# EAGLE board FLATPACKS (EAGLE 4.09)

Size 160 x 100 mm. Coordinates in mm from the lower left corner, seen from the top.
Outline: 0,0 160,0 160,100 0,100 0,0
Copper layers used: 

## Footprints (pad centres in the part's own frame; a part is rotated, then mirrored left to right if it is on the bottom)
TQFP32 = smd 1.27 x 0.559: 1 -4.293,2.743; 2 -4.293,1.956; 3 -4.293,1.168; 4 -4.293,0.381; 5 -4.293,-0.381; 6 -4.293,-1.168; 7 -4.293,-1.956; 8 -4.293,-2.743; 17 4.293,-2.743; 18 4.293,-1.956; 19 4.293,-1.168; 20 4.293,-0.381; 21 4.293,0.381; 22 4.293,1.168; 23 4.293,1.956; 24 4.293,2.743 | smd 0.559 x 1.27: 9 -2.743,-4.293; 10 -1.956,-4.293; 11 -1.168,-4.293; 12 -0.381,-4.293; 13 0.381,-4.293; 14 1.168,-4.293; 15 1.956,-4.293; 16 2.743,-4.293; 25 2.743,4.293; 26 1.956,4.293; 27 1.168,4.293; 28 0.381,4.293; 29 -0.381,4.293; 30 -1.168,4.293; 31 -1.956,4.293; 32 -2.743,4.293
TQFP44 = smd 1.5 x 0.5: 1 -5.8,4; 2 -5.8,3.2; 3 -5.8,2.4; 4 -5.8,1.6; 5 -5.8,0.8; 6 -5.8,0; 7 -5.8,-0.8; 8 -5.8,-1.6; 9 -5.8,-2.4; 10 -5.8,-3.2; 11 -5.8,-4; 23 5.8,-4; 24 5.8,-3.2; 25 5.8,-2.4; 26 5.8,-1.6; 27 5.8,-0.8; 28 5.8,0; 29 5.8,0.8; 30 5.8,1.6; 31 5.8,2.4; 32 5.8,3.2; 33 5.8,4 | smd 0.5 x 1.5: 12 -4,-5.8; 13 -3.2,-5.8; 14 -2.4,-5.8; 15 -1.6,-5.8; 16 -0.8,-5.8; 17 0,-5.8; 18 0.8,-5.8; 19 1.6,-5.8; 20 2.4,-5.8; 21 3.2,-5.8; 22 4,-5.8; 34 4,5.8; 35 3.2,5.8; 36 2.4,5.8; 37 1.6,5.8; 38 0.8,5.8; 39 0,5.8; 40 -0.8,5.8; 41 -1.6,5.8; 42 -2.4,5.8; 43 -3.2,5.8; 44 -4,5.8
TQFP64 = smd 1.194 x 0.559: 1 -7.76,5.905; 2 -7.76,5.118; 3 -7.76,4.331; 4 -7.76,3.543; 5 -7.76,2.756; 6 -7.76,1.968; 7 -7.76,1.181; 8 -7.76,0.394; 9 -7.76,-0.394; 10 -7.76,-1.181; 11 -7.76,-1.968; 12 -7.76,-2.756; 13 -7.76,-3.543; 14 -7.76,-4.331; 15 -7.76,-5.118; 16 -7.76,-5.905; 33 7.76,-5.905; 34 7.76,-5.118; 35 7.76,-4.331; 36 7.76,-3.543; 37 7.76,-2.756; 38 7.76,-1.968; 39 7.76,-1.181; 40 7.76,-0.394; 41 7.76,0.394; 42 7.76,1.181; 43 7.76,1.968; 44 7.76,2.756; 45 7.76,3.543; 46 7.76,4.331; 47 7.76,5.118; 48 7.76,5.905 | smd 0.559 x 1.194: 17 -5.905,-7.76; 18 -5.118,-7.76; 19 -4.331,-7.76; 20 -3.543,-7.76; 21 -2.756,-7.76; 22 -1.968,-7.76; 23 -1.181,-7.76; 24 -0.394,-7.76; 25 0.394,-7.76; 26 1.181,-7.76; 27 1.968,-7.76; 28 2.756,-7.76; 29 3.543,-7.76; 30 4.331,-7.76; 31 5.118,-7.76; 32 5.905,-7.76; 49 5.905,7.76; 50 5.118,7.76; 51 4.331,7.76; 52 3.543,7.76; 53 2.756,7.76; 54 1.968,7.76; 55 1.181,7.76; 56 0.394,7.76; 57 -0.394,7.76; 58 -1.181,7.76; 59 -1.968,7.76; 60 -2.756,7.76; 61 -3.543,7.76; 62 -4.331,7.76; 63 -5.118,7.76; 64 -5.905,7.76
TQFP144 = smd 0.27 x 1.5: 1 -8.75,-10.75; 2 -8.25,-10.75; 3 -7.75,-10.75; 4 -7.25,-10.75; 5 -6.75,-10.75; 6 -6.25,-10.75; 7 -5.75,-10.75; 8 -5.25,-10.75; 9 -4.75,-10.75; 10 -4.25,-10.75; 11 -3.75,-10.75; 12 -3.25,-10.75; 13 -2.75,-10.75; 14 -2.25,-10.75; 15 -1.75,-10.75; 16 -1.25,-10.75; 17 -0.75,-10.75; 18 -0.25,-10.75; 19 0.25,-10.75; 20 0.75,-10.75; 21 1.25,-10.75; 22 1.75,-10.75; 23 2.25,-10.75; 24 2.75,-10.75; 25 3.25,-10.75; 26 3.75,-10.75; 27 4.25,-10.75; 28 4.75,-10.75; 29 5.25,-10.75; 30 5.75,-10.75; 31 6.25,-10.75; 32 6.75,-10.75; 33 7.25,-10.75; 34 7.75,-10.75; 35 8.25,-10.75; 36 8.75,-10.75; 73 8.75,10.75; 74 8.25,10.75; 75 7.75,10.75; 76 7.25,10.75; 77 6.75,10.75; 78 6.25,10.75; 79 5.75,10.75; 80 5.25,10.75; 81 4.75,10.75; 82 4.25,10.75; 83 3.75,10.75; 84 3.25,10.75; 85 2.75,10.75; 86 2.25,10.75; 87 1.75,10.75; 88 1.25,10.75; 89 0.75,10.75; 90 0.25,10.75; 91 -0.25,10.75; 92 -0.75,10.75; 93 -1.25,10.75; 94 -1.75,10.75; 95 -2.25,10.75; 96 -2.75,10.75; 97 -3.25,10.75; 98 -3.75,10.75; 99 -4.25,10.75; 100 -4.75,10.75; 101 -5.25,10.75; 102 -5.75,10.75; 103 -6.25,10.75; 104 -6.75,10.75; 105 -7.25,10.75; 106 -7.75,10.75; 107 -8.25,10.75; 108 -8.75,10.75 | smd 1.5 x 0.27: 37 10.75,-8.75; 38 10.75,-8.25; 39 10.75,-7.75; 40 10.75,-7.25; 41 10.75,-6.75; 42 10.75,-6.25; 43 10.75,-5.75; 44 10.75,-5.25; 45 10.75,-4.75; 46 10.75,-4.25; 47 10.75,-3.75; 48 10.75,-3.25; 49 10.75,-2.75; 50 10.75,-2.25; 51 10.75,-1.75; 52 10.75,-1.25; 53 10.75,-0.75; 54 10.75,-0.25; 55 10.75,0.25; 56 10.75,0.75; 57 10.75,1.25; 58 10.75,1.75; 59 10.75,2.25; 60 10.75,2.75; 61 10.75,3.25; 62 10.75,3.75; 63 10.75,4.25; 64 10.75,4.75; 65 10.75,5.25; 66 10.75,5.75; 67 10.75,6.25; 68 10.75,6.75; 69 10.75,7.25; 70 10.75,7.75; 71 10.75,8.25; 72 10.75,8.75; 109 -10.75,8.75; 110 -10.75,8.25; 111 -10.75,7.75; 112 -10.75,7.25; 113 -10.75,6.75; 114 -10.75,6.25; 115 -10.75,5.75; 116 -10.75,5.25; 117 -10.75,4.75; 118 -10.75,4.25; 119 -10.75,3.75; 120 -10.75,3.25; 121 -10.75,2.75; 122 -10.75,2.25; 123 -10.75,1.75; 124 -10.75,1.25; 125 -10.75,0.75; 126 -10.75,0.25; 127 -10.75,-0.25; 128 -10.75,-0.75; 129 -10.75,-1.25; 130 -10.75,-1.75; 131 -10.75,-2.25; 132 -10.75,-2.75; 133 -10.75,-3.25; 134 -10.75,-3.75; 135 -10.75,-4.25; 136 -10.75,-4.75; 137 -10.75,-5.25; 138 -10.75,-5.75; 139 -10.75,-6.25; 140 -10.75,-6.75; 141 -10.75,-7.25; 142 -10.75,-7.75; 143 -10.75,-8.25; 144 -10.75,-8.75
TQFP100 = smd 1.5 x 0.35: 1 -8,6; 2 -8,5.5; 3 -8,5; 4 -8,4.5; 5 -8,4; 6 -8,3.5; 7 -8,3; 8 -8,2.5; 9 -8,2; 10 -8,1.5; 11 -8,1; 12 -8,0.5; 13 -8,0; 14 -8,-0.5; 15 -8,-1; 16 -8,-1.5; 17 -8,-2; 18 -8,-2.5; 19 -8,-3; 20 -8,-3.5; 21 -8,-4; 22 -8,-4.5; 23 -8,-5; 24 -8,-5.5; 25 -8,-6; 51 8,-6; 52 8,-5.5; 53 8,-5; 54 8,-4.5; 55 8,-4; 56 8,-3.5; 57 8,-3; 58 8,-2.5; 59 8,-2; 60 8,-1.5; 61 8,-1; 62 8,-0.5; 63 8,0; 64 8,0.5; 65 8,1; 66 8,1.5; 67 8,2; 68 8,2.5; 69 8,3; 70 8,3.5; 71 8,4; 72 8,4.5; 73 8,5; 74 8,5.5; 75 8,6 | smd 0.35 x 1.5: 26 -6,-8; 27 -5.5,-8; 28 -5,-8; 29 -4.5,-8; 30 -4,-8; 31 -3.5,-8; 32 -3,-8; 33 -2.5,-8; 34 -2,-8; 35 -1.5,-8; 36 -1,-8; 37 -0.5,-8; 38 0,-8; 39 0.5,-8; 40 1,-8; 41 1.5,-8; 42 2,-8; 43 2.5,-8; 44 3,-8; 45 3.5,-8; 46 4,-8; 47 4.5,-8; 48 5,-8; 49 5.5,-8; 50 6,-8; 76 6,8; 77 5.5,8; 78 5,8; 79 4.5,8; 80 4,8; 81 3.5,8; 82 3,8; 83 2.5,8; 84 2,8; 85 1.5,8; 86 1,8; 87 0.5,8; 88 0,8; 89 -0.5,8; 90 -1,8; 91 -1.5,8; 92 -2,8; 93 -2.5,8; 94 -3,8; 95 -3.5,8; 96 -4,8; 97 -4.5,8; 98 -5,8; 99 -5.5,8; 100 -6,8
QFP-44 = smd 0.4 x 2.2: 1 -4,-6.25; 2 -3.2,-6.25; 3 -2.4,-6.25; 4 -1.6,-6.25; 5 -0.8,-6.25; 6 0,-6.25; 7 0.8,-6.25; 8 1.6,-6.25; 9 2.4,-6.24; 10 3.2,-6.25; 11 4,-6.25; 23 4,6.25; 24 3.2,6.25; 25 2.4,6.26; 26 1.6,6.25; 27 0.8,6.25; 28 0,6.25; 29 -0.8,6.25; 30 -1.6,6.25; 31 -2.4,6.25; 32 -3.2,6.25; 33 -4,6.25 | smd 2.2 x 0.4: 12 6.75,-4; 13 6.75,-3.2; 14 6.75,-2.4; 15 6.75,-1.6; 16 6.75,-0.8; 17 6.75,0; 18 6.75,0.8; 19 6.75,1.6; 20 6.74,2.4; 21 6.75,3.2; 22 6.75,4; 34 -6.75,4; 35 -6.75,3.2; 36 -6.76,2.4; 37 -6.75,1.6; 38 -6.75,0.8; 39 -6.75,0; 40 -6.75,-0.8; 41 -6.75,-1.6; 42 -6.75,-2.4; 43 -6.75,-3.2; 44 -6.75,-4
PQFP44 = smd 2 x 0.5: 1 -6.2,4; 2 -6.2,3.2; 3 -6.2,2.4; 4 -6.2,1.6; 5 -6.2,0.8; 6 -6.2,0; 7 -6.2,-0.8; 8 -6.2,-1.6; 9 -6.2,-2.4; 10 -6.2,-3.2; 11 -6.2,-4; 23 6.2,-4; 24 6.2,-3.2; 25 6.2,-2.4; 26 6.2,-1.6; 27 6.2,-0.8; 28 6.2,0; 29 6.2,0.8; 30 6.2,1.6; 31 6.2,2.4; 32 6.2,3.2; 33 6.2,4 | smd 0.5 x 2: 12 -4,-6.2; 13 -3.2,-6.2; 14 -2.4,-6.2; 15 -1.6,-6.2; 16 -0.8,-6.2; 17 0,-6.2; 18 0.8,-6.2; 19 1.6,-6.2; 20 2.4,-6.2; 21 3.2,-6.2; 22 4,-6.2; 34 4,6.2; 35 3.2,6.2; 36 2.4,6.2; 37 1.6,6.2; 38 0.8,6.2; 39 0,6.2; 40 -0.8,6.2; 41 -1.6,6.2; 42 -2.4,6.2; 43 -3.2,6.2; 44 -4,6.2
PQFP100 = smd 0.35 x 1.8: 1 -7.62,-10.7; 2 -6.985,-10.7; 3 -6.35,-10.7; 4 -5.715,-10.7; 5 -5.08,-10.7; 6 -4.445,-10.7; 7 -3.81,-10.7; 8 -3.175,-10.7; 9 -2.54,-10.7; 10 -1.905,-10.7; 11 -1.27,-10.7; 12 -0.635,-10.7; 13 0,-10.7; 14 0.635,-10.7; 15 1.27,-10.7; 16 1.905,-10.7; 17 2.54,-10.7; 18 3.175,-10.7; 19 3.81,-10.7; 20 4.445,-10.7; 21 5.08,-10.7; 22 5.715,-10.7; 23 6.35,-10.7; 24 6.985,-10.7; 25 7.62,-10.7; 51 7.62,10.7; 52 6.985,10.7; 53 6.35,10.7; 54 5.715,10.7; 55 5.08,10.7; 56 4.445,10.7; 57 3.81,10.7; 58 3.175,10.7; 59 2.54,10.7; 60 1.905,10.7; 61 1.27,10.7; 62 0.635,10.7; 63 0,10.7; 64 -0.635,10.7; 65 -1.27,10.7; 66 -1.905,10.7; 67 -2.54,10.7; 68 -3.175,10.7; 69 -3.81,10.7; 70 -4.445,10.7; 71 -5.08,10.7; 72 -5.715,10.7; 73 -6.35,10.7; 74 -6.985,10.7; 75 -7.62,10.7 | smd 1.8 x 0.35: 26 10.7,-7.62; 27 10.7,-6.985; 28 10.7,-6.35; 29 10.7,-5.715; 30 10.7,-5.08; 31 10.7,-4.445; 32 10.7,-3.81; 33 10.7,-3.175; 34 10.7,-2.54; 35 10.7,-1.905; 36 10.7,-1.27; 37 10.7,-0.635; 38 10.7,0; 39 10.7,0.635; 40 10.7,1.27; 41 10.7,1.905; 42 10.7,2.54; 43 10.7,3.175; 44 10.7,3.81; 45 10.7,4.445; 46 10.7,5.08; 47 10.7,5.715; 48 10.7,6.35; 49 10.7,6.985; 50 10.7,7.62; 76 -10.7,7.62; 77 -10.7,6.985; 78 -10.7,6.35; 79 -10.7,5.715; 80 -10.7,5.08; 81 -10.7,4.445; 82 -10.7,3.81; 83 -10.7,3.175; 84 -10.7,2.54; 85 -10.7,1.905; 86 -10.7,1.27; 87 -10.7,0.635; 88 -10.7,0; 89 -10.7,-0.635; 90 -10.7,-1.27; 91 -10.7,-1.905; 92 -10.7,-2.54; 93 -10.7,-3.175; 94 -10.7,-3.81; 95 -10.7,-4.445; 96 -10.7,-5.08; 97 -10.7,-5.715; 98 -10.7,-6.35; 99 -10.7,-6.985; 100 -10.7,-7.62
SQFP-R-14X20-100 = smd 0.4 x 1.8: 1 -9.425,-8.1; 2 -8.775,-8.1; 3 -8.125,-8.1; 4 -7.475,-8.1; 5 -6.825,-8.1; 6 -6.175,-8.1; 7 -5.525,-8.1; 8 -4.875,-8.1; 9 -4.225,-8.1; 10 -3.575,-8.1; 11 -2.925,-8.1; 12 -2.275,-8.1; 13 -1.625,-8.1; 14 -0.975,-8.1; 15 -0.325,-8.1; 16 0.325,-8.1; 17 0.975,-8.1; 18 1.625,-8.1; 19 2.275,-8.1; 20 2.925,-8.1; 21 3.575,-8.1; 22 4.225,-8.1; 23 4.875,-8.1; 24 5.525,-8.1; 25 6.175,-8.1; 26 6.825,-8.1; 27 7.475,-8.1; 28 8.125,-8.1; 29 8.775,-8.1; 30 9.425,-8.1; 51 9.425,8.1; 52 8.775,8.1; 53 8.125,8.1; 54 7.475,8.1; 55 6.825,8.1; 56 6.175,8.1; 57 5.525,8.1; 58 4.875,8.1; 59 4.225,8.1; 60 3.575,8.1; 61 2.925,8.1; 62 2.275,8.1; 63 1.625,8.1; 64 0.975,8.1; 65 0.325,8.1; 66 -0.325,8.1; 67 -0.975,8.1; 68 -1.625,8.1; 69 -2.275,8.1; 70 -2.925,8.1; 71 -3.575,8.1; 72 -4.225,8.1; 73 -4.875,8.1; 74 -5.525,8.1; 75 -6.175,8.1; 76 -6.825,8.1; 77 -7.475,8.1; 78 -8.125,8.1; 79 -8.775,8.1; 80 -9.425,8.1 | smd 1.8 x 0.4: 31 11.1,-6.175; 32 11.1,-5.525; 33 11.1,-4.875; 34 11.1,-4.225; 35 11.1,-3.575; 36 11.1,-2.925; 37 11.1,-2.275; 38 11.1,-1.625; 39 11.1,-0.975; 40 11.1,-0.325; 41 11.1,0.325; 42 11.1,0.975; 43 11.1,1.625; 44 11.1,2.275; 45 11.1,2.925; 46 11.1,3.575; 47 11.1,4.225; 48 11.1,4.875; 49 11.1,5.525; 50 11.1,6.175; 81 -11.1,6.175; 82 -11.1,5.525; 83 -11.1,4.875; 84 -11.1,4.225; 85 -11.1,3.575; 86 -11.1,2.925; 87 -11.1,2.275; 88 -11.1,1.625; 89 -11.1,0.975; 90 -11.1,0.325; 91 -11.1,-0.325; 92 -11.1,-0.975; 93 -11.1,-1.625; 94 -11.1,-2.275; 95 -11.1,-2.925; 96 -11.1,-3.575; 97 -11.1,-4.225; 98 -11.1,-4.875; 99 -11.1,-5.525; 100 -11.1,-6.175
PQFP160 = smd 2 x 0.45: 1 -15.275,12.675; 2 -15.275,12.025; 3 -15.275,11.375; 4 -15.275,10.725; 5 -15.275,10.075; 6 -15.275,9.425; 7 -15.275,8.775; 8 -15.275,8.125; 9 -15.275,7.475; 10 -15.275,6.825; 11 -15.275,6.175; 12 -15.275,5.525; 13 -15.275,4.875; 14 -15.275,4.225; 15 -15.275,3.575; 16 -15.275,2.925; 17 -15.275,2.275; 18 -15.275,1.625; 19 -15.275,0.975; 20 -15.275,0.325; 21 -15.275,-0.325; 22 -15.275,-0.975; 23 -15.275,-1.625; 24 -15.275,-2.275; 25 -15.275,-2.925; 26 -15.275,-3.575; 27 -15.275,-4.225; 28 -15.275,-4.875; 29 -15.275,-5.525; 30 -15.275,-6.175; 31 -15.275,-6.825; 32 -15.275,-7.475; 33 -15.275,-8.125; 34 -15.275,-8.775; 35 -15.275,-9.425; 36 -15.275,-10.075; 37 -15.275,-10.725; 38 -15.275,-11.375; 39 -15.275,-12.025; 40 -15.275,-12.675; 81 15.275,-12.675; 82 15.275,-12.025; 83 15.275,-11.375; 84 15.275,-10.725; 85 15.275,-10.075; 86 15.275,-9.425; 87 15.275,-8.775; 88 15.275,-8.125; 89 15.275,-7.475; 90 15.275,-6.825; 91 15.275,-6.175; 92 15.275,-5.525; 93 15.275,-4.875; 94 15.275,-4.225; 95 15.275,-3.575; 96 15.275,-2.925; 97 15.275,-2.275; 98 15.275,-1.625; 99 15.275,-0.975; 100 15.275,-0.325; 101 15.275,0.325; 102 15.275,0.975; 103 15.275,1.625; 104 15.275,2.275; 105 15.275,2.925; 106 15.275,3.575; 107 15.275,4.225; 108 15.275,4.875; 109 15.275,5.525; 110 15.275,6.175; 111 15.275,6.825; 112 15.275,7.475; 113 15.275,8.125; 114 15.275,8.775; 115 15.275,9.425; 116 15.275,10.075; 117 15.275,10.725; 118 15.275,11.375; 119 15.275,12.025; 120 15.275,12.675 | smd 0.45 x 2: 41 -12.675,-15.275; 42 -12.025,-15.275; 43 -11.375,-15.275; 44 -10.725,-15.275; 45 -10.075,-15.275; 46 -9.425,-15.275; 47 -8.775,-15.275; 48 -8.125,-15.275; 49 -7.475,-15.275; 50 -6.825,-15.275; 51 -6.175,-15.275; 52 -5.525,-15.275; 53 -4.875,-15.275; 54 -4.225,-15.275; 55 -3.575,-15.275; 56 -2.925,-15.275; 57 -2.275,-15.275; 58 -1.625,-15.275; 59 -0.975,-15.275; 60 -0.325,-15.275; 61 0.325,-15.275; 62 0.975,-15.275; 63 1.625,-15.275; 64 2.275,-15.275; 65 2.925,-15.275; 66 3.575,-15.275; 67 4.225,-15.275; 68 4.875,-15.275; 69 5.525,-15.275; 70 6.175,-15.275; 71 6.825,-15.275; 72 7.475,-15.275; 73 8.125,-15.275; 74 8.775,-15.275; 75 9.425,-15.275; 76 10.075,-15.275; 77 10.725,-15.275; 78 11.375,-15.275; 79 12.025,-15.275; 80 12.675,-15.275; 121 12.675,15.275; 122 12.025,15.275; 123 11.375,15.275; 124 10.725,15.275; 125 10.075,15.275; 126 9.425,15.275; 127 8.775,15.275; 128 8.125,15.275; 129 7.475,15.275; 130 6.825,15.275; 131 6.175,15.275; 132 5.525,15.275; 133 4.875,15.275; 134 4.225,15.275; 135 3.575,15.275; 136 2.925,15.275; 137 2.275,15.275; 138 1.625,15.275; 139 0.975,15.275; 140 0.325,15.275; 141 -0.325,15.275; 142 -0.975,15.275; 143 -1.625,15.275; 144 -2.275,15.275; 145 -2.925,15.275; 146 -3.575,15.275; 147 -4.225,15.275; 148 -4.875,15.275; 149 -5.525,15.275; 150 -6.175,15.275; 151 -6.825,15.275; 152 -7.475,15.275; 153 -8.125,15.275; 154 -8.775,15.275; 155 -9.425,15.275; 156 -10.075,15.275; 157 -10.725,15.275; 158 -11.375,15.275; 159 -12.025,15.275; 160 -12.675,15.275
PQFP208 = smd 1.2 x 0.32: 1 -15.3,12.75; 2 -15.3,12.25; 3 -15.3,11.75; 4 -15.3,11.25; 5 -15.3,10.75; 6 -15.3,10.25; 7 -15.3,9.75; 8 -15.3,9.25; 9 -15.3,8.75; 10 -15.3,8.25; 11 -15.3,7.75; 12 -15.3,7.25; 13 -15.3,6.75; 14 -15.3,6.25; 15 -15.3,5.75; 16 -15.3,5.25; 17 -15.3,4.75; 18 -15.3,4.25; 19 -15.3,3.75; 20 -15.3,3.25; 21 -15.3,2.75; 22 -15.3,2.25; 23 -15.3,1.75; 24 -15.3,1.25; 25 -15.3,0.75; 26 -15.3,0.25; 27 -15.3,-0.25; 28 -15.3,-0.75; 29 -15.3,-1.25; 30 -15.3,-1.75; 31 -15.3,-2.25; 32 -15.3,-2.75; 33 -15.3,-3.25; 34 -15.3,-3.75; 35 -15.3,-4.25; 36 -15.3,-4.75; 37 -15.3,-5.25; 38 -15.3,-5.75; 39 -15.3,-6.25; 40 -15.3,-6.75; 41 -15.3,-7.25; 42 -15.3,-7.75; 43 -15.3,-8.25; 44 -15.3,-8.75; 45 -15.3,-9.25; 46 -15.3,-9.75; 47 -15.3,-10.25; 48 -15.3,-10.75; 49 -15.3,-11.25; 50 -15.3,-11.75; 51 -15.3,-12.25; 52 -15.3,-12.75; 105 15.3,-12.75; 106 15.3,-12.25; 107 15.3,-11.75; 108 15.3,-11.25; 109 15.3,-10.75; 110 15.3,-10.25; 111 15.3,-9.75; 112 15.3,-9.25; 113 15.3,-8.75; 114 15.3,-8.25; 115 15.3,-7.75; 116 15.3,-7.25; 117 15.3,-6.75; 118 15.3,-6.25; 119 15.3,-5.75; 120 15.3,-5.25; 121 15.3,-4.75; 122 15.3,-4.25; 123 15.3,-3.75; 124 15.3,-3.25; 125 15.3,-2.75; 126 15.3,-2.25; 127 15.3,-1.75; 128 15.3,-1.25; 129 15.3,-0.75; 130 15.3,-0.25; 131 15.3,0.25; 132 15.3,0.75; 133 15.3,1.25; 134 15.3,1.75; 135 15.3,2.25; 136 15.3,2.75; 137 15.3,3.25; 138 15.3,3.75; 139 15.3,4.25; 140 15.3,4.75; 141 15.3,5.25; 142 15.3,5.75; 143 15.3,6.25; 144 15.3,6.75; 145 15.3,7.25; 146 15.3,7.75; 147 15.3,8.25; 148 15.3,8.75; 149 15.3,9.25; 150 15.3,9.75; 151 15.3,10.25; 152 15.3,10.75; 153 15.3,11.25; 154 15.3,11.75; 155 15.3,12.25; 156 15.3,12.75 | smd 0.32 x 1.2: 53 -12.75,-15.3; 54 -12.25,-15.3; 55 -11.75,-15.3; 56 -11.25,-15.3; 57 -10.75,-15.3; 58 -10.25,-15.3; 59 -9.75,-15.3; 60 -9.25,-15.3; 61 -8.75,-15.3; 62 -8.25,-15.3; 63 -7.75,-15.3; 64 -7.25,-15.3; 65 -6.75,-15.3; 66 -6.25,-15.3; 67 -5.75,-15.3; 68 -5.25,-15.3; 69 -4.75,-15.3; 70 -4.25,-15.3; 71 -3.75,-15.3; 72 -3.25,-15.3; 73 -2.75,-15.3; 74 -2.25,-15.3; 75 -1.75,-15.3; 76 -1.25,-15.3; 77 -0.75,-15.3; 78 -0.25,-15.3; 79 0.25,-15.3; 80 0.75,-15.3; 81 1.25,-15.3; 82 1.75,-15.3; 83 2.25,-15.3; 84 2.75,-15.3; 85 3.25,-15.3; 86 3.75,-15.3; 87 4.25,-15.3; 88 4.75,-15.3; 89 5.25,-15.3; 90 5.75,-15.3; 91 6.25,-15.3; 92 6.75,-15.3; 93 7.25,-15.3; 94 7.75,-15.3; 95 8.25,-15.3; 96 8.75,-15.3; 97 9.25,-15.3; 98 9.75,-15.3; 99 10.25,-15.3; 100 10.75,-15.3; 101 11.25,-15.3; 102 11.75,-15.3; 103 12.25,-15.3; 104 12.75,-15.3; 157 12.75,15.3; 158 12.25,15.3; 159 11.75,15.3; 160 11.25,15.3; 161 10.75,15.3; 162 10.25,15.3; 163 9.75,15.3; 164 9.25,15.3; 165 8.75,15.3; 166 8.25,15.3; 167 7.75,15.3; 168 7.25,15.3; 169 6.75,15.3; 170 6.25,15.3; 171 5.75,15.3; 172 5.25,15.3; 173 4.75,15.3; 174 4.25,15.3; 175 3.75,15.3; 176 3.25,15.3; 177 2.75,15.3; 178 2.25,15.3; 179 1.75,15.3; 180 1.25,15.3; 181 0.75,15.3; 182 0.25,15.3; 183 -0.25,15.3; 184 -0.75,15.3; 185 -1.25,15.3; 186 -1.75,15.3; 187 -2.25,15.3; 188 -2.75,15.3; 189 -3.25,15.3; 190 -3.75,15.3; 191 -4.25,15.3; 192 -4.75,15.3; 193 -5.25,15.3; 194 -5.75,15.3; 195 -6.25,15.3; 196 -6.75,15.3; 197 -7.25,15.3; 198 -7.75,15.3; 199 -8.25,15.3; 200 -8.75,15.3; 201 -9.25,15.3; 202 -9.75,15.3; 203 -10.25,15.3; 204 -10.75,15.3; 205 -11.25,15.3; 206 -11.75,15.3; 207 -12.25,15.3; 208 -12.75,15.3
PQFP240 = smd 1.5 x 0.32: 1 -17,14.75; 2 -17,14.25; 3 -17,13.75; 4 -17,13.25; 5 -17,12.75; 6 -17,12.25; 7 -17,11.75; 8 -17,11.25; 9 -17,10.75; 10 -17,10.25; 11 -17,9.75; 12 -17,9.25; 13 -17,8.75; 14 -17,8.25; 15 -17,7.75; 16 -17,7.25; 17 -17,6.75; 18 -17,6.25; 19 -17,5.75; 20 -17,5.25; 21 -17,4.75; 22 -17,4.25; 23 -17,3.75; 24 -17,3.25; 25 -17,2.75; 26 -17,2.25; 27 -17,1.75; 28 -17,1.25; 29 -17,0.75; 30 -17,0.25; 31 -17,-0.25; 32 -17,-0.75; 33 -17,-1.25; 34 -17,-1.75; 35 -17,-2.25; 36 -17,-2.75; 37 -17,-3.25; 38 -17,-3.75; 39 -17,-4.25; 40 -17,-4.75; 41 -17,-5.25; 42 -17,-5.75; 43 -17,-6.25; 44 -17,-6.75; 45 -17,-7.25; 46 -17,-7.75; 47 -17,-8.25; 48 -17,-8.75; 49 -17,-9.25; 50 -17,-9.75; 51 -17,-10.25; 52 -17,-10.75; 53 -17,-11.25; 54 -17,-11.75; 55 -17,-12.25; 56 -17,-12.75; 57 -17,-13.25; 58 -17,-13.75; 59 -17,-14.25; 60 -17,-14.75; 121 17,-14.75; 122 17,-14.25; 123 17,-13.75; 124 17,-13.25; 125 17,-12.75; 126 17,-12.25; 127 17,-11.75; 128 17,-11.25; 129 17,-10.75; 130 17,-10.25; 131 17,-9.75; 132 17,-9.25; 133 17,-8.75; 134 17,-8.25; 135 17,-7.75; 136 17,-7.25; 137 17,-6.75; 138 17,-6.25; 139 17,-5.75; 140 17,-5.25; 141 17,-4.75; 142 17,-4.25; 143 17,-3.75; 144 17,-3.25; 145 17,-2.75; 146 17,-2.25; 147 17,-1.75; 148 17,-1.25; 149 17,-0.75; 150 17,-0.25; 151 17,0.25; 152 17,0.75; 153 17,1.25; 154 17,1.75; 155 17,2.25; 156 17,2.75; 157 17,3.25; 158 17,3.75; 159 17,4.25; 160 17,4.75; 161 17,5.25; 162 17,5.75; 163 17,6.25; 164 17,6.75; 165 17,7.25; 166 17,7.75; 167 17,8.25; 168 17,8.75; 169 17,9.25; 170 17,9.75; 171 17,10.25; 172 17,10.75; 173 17,11.25; 174 17,11.75; 175 17,12.25; 176 17,12.75; 177 17,13.25; 178 17,13.75; 179 17,14.25; 180 17,14.75 | smd 0.32 x 1.5: 61 -14.75,-17; 62 -14.25,-17; 63 -13.75,-17; 64 -13.25,-17; 65 -12.75,-17; 66 -12.25,-17; 67 -11.75,-17; 68 -11.25,-17; 69 -10.75,-17; 70 -10.25,-17; 71 -9.75,-17; 72 -9.25,-17; 73 -8.75,-17; 74 -8.25,-17; 75 -7.75,-17; 76 -7.25,-17; 77 -6.75,-17; 78 -6.25,-17; 79 -5.75,-17; 80 -5.25,-17; 81 -4.75,-17; 82 -4.25,-17; 83 -3.75,-17; 84 -3.25,-17; 85 -2.75,-17; 86 -2.25,-17; 87 -1.75,-17; 88 -1.25,-17; 89 -0.75,-17; 90 -0.25,-17; 91 0.25,-17; 92 0.75,-17; 93 1.25,-17; 94 1.75,-17; 95 2.25,-17; 96 2.75,-17; 97 3.25,-17; 98 3.75,-17; 99 4.25,-17; 100 4.75,-17; 101 5.25,-17; 102 5.75,-17; 103 6.25,-17; 104 6.75,-17; 105 7.25,-17; 106 7.75,-17; 107 8.25,-17; 108 8.75,-17; 109 9.25,-17; 110 9.75,-17; 111 10.25,-17; 112 10.75,-17; 113 11.25,-17; 114 11.75,-17; 115 12.25,-17; 116 12.75,-17; 117 13.25,-17; 118 13.75,-17; 119 14.25,-17; 120 14.75,-17; 181 14.75,17; 182 14.25,17; 183 13.75,17; 184 13.25,17; 185 12.75,17; 186 12.25,17; 187 11.75,17; 188 11.25,17; 189 10.75,17; 190 10.25,17; 191 9.75,17; 192 9.25,17; 193 8.75,17; 194 8.25,17; 195 7.75,17; 196 7.25,17; 197 6.75,17; 198 6.25,17; 199 5.75,17; 200 5.25,17; 201 4.75,17; 202 4.25,17; 203 3.75,17; 204 3.25,17; 205 2.75,17; 206 2.25,17; 207 1.75,17; 208 1.25,17; 209 0.75,17; 210 0.25,17; 211 -0.25,17; 212 -0.75,17; 213 -1.25,17; 214 -1.75,17; 215 -2.25,17; 216 -2.75,17; 217 -3.25,17; 218 -3.75,17; 219 -4.25,17; 220 -4.75,17; 221 -5.25,17; 222 -5.75,17; 223 -6.25,17; 224 -6.75,17; 225 -7.25,17; 226 -7.75,17; 227 -8.25,17; 228 -8.75,17; 229 -9.25,17; 230 -9.75,17; 231 -10.25,17; 232 -10.75,17; 233 -11.25,17; 234 -11.75,17; 235 -12.25,17; 236 -12.75,17; 237 -13.25,17; 238 -13.75,17; 239 -14.25,17; 240 -14.75,17

## Placement (x,y rotation side)
E$1  TQFP32  [TQFP32]  10.79,85.56 0 top
E$2  TQFP44  [TQFP44]  26.03,84.29 0 top
E$3  TQFP64  [TQFP64]  46.35,81.75 0 top
E$4  TQFP144  [TQFP144]  92.07,79.21 0 top
E$5  TQFP100  [TQFP100]  67.94,81.75 0 top
E$6  QFP-44  [QFP-44]  114.93,83.02 0 top
E$7  PQFP44  [PQFP44]  133.98,83.02 0 top
E$8  PQFP1OO  [PQFP100]  18.41,46.19 0 top
E$9  SQFP-R-14X20-100  [SQFP-R-14X20-100]  18.41,16.98 0 top
E$10  PQFP160  [PQFP160]  56.51,43.65 0 top
E$11  PQFP208  [PQFP208]  93.34,43.65 0 top
E$12  PQFP240  [PQFP240]  132.71,43.65 0 top

## Library data of the parts
E$1-E$3 = atmel
E$4 = micro-siemens
E$5 = lattice
E$6 = exar
E$7 = micronas
E$8 E$9 = smd-ipc
E$10-E$12 = altera